# Altium PCB PCB.PcbDoc
Units mm, origin at the board's own origin, x right, y up, seen from the top; angles counter-clockwise.
Board outline 94 x 70 mm, 2 copper layers (Top Layer, Bottom Layer), stack 1.56 mm thick; 49 components, 33 nets, 150 pads, 54 vias.
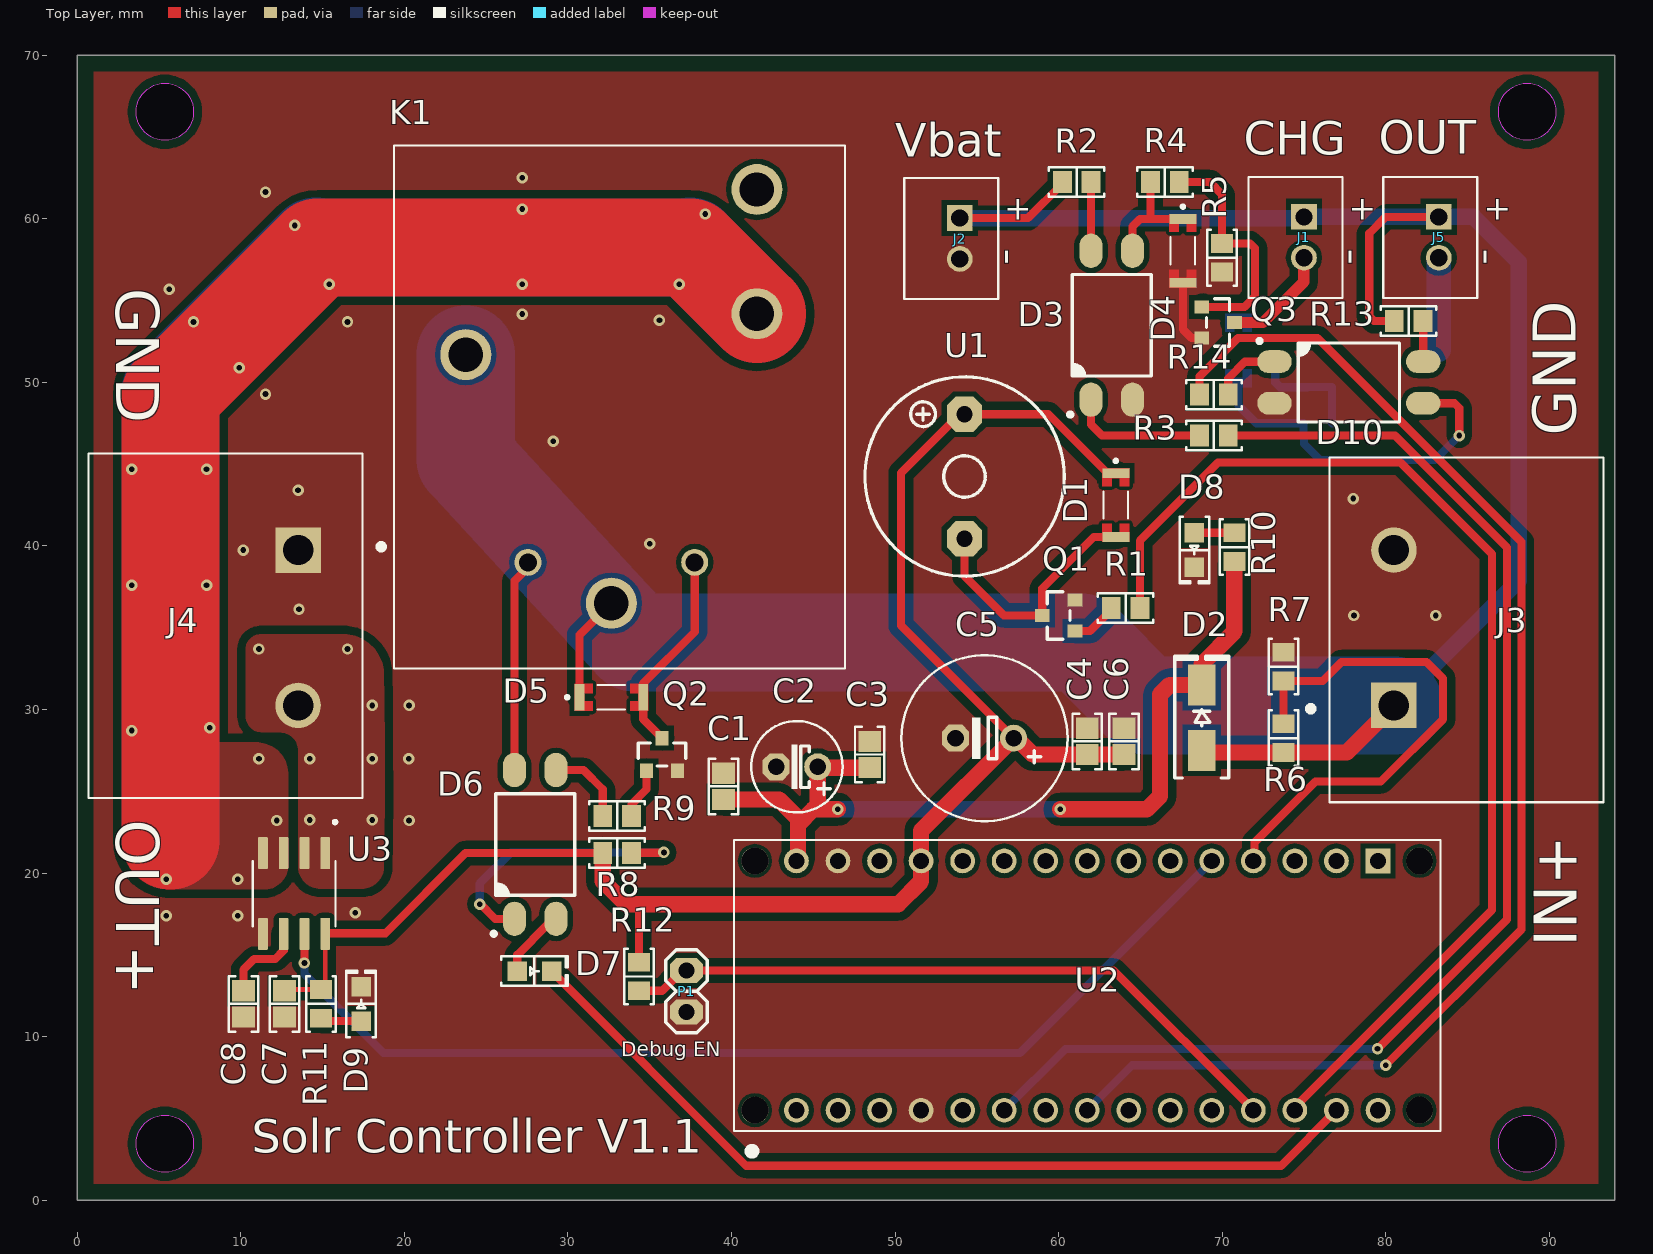
[diagram p0: Top Layer view]
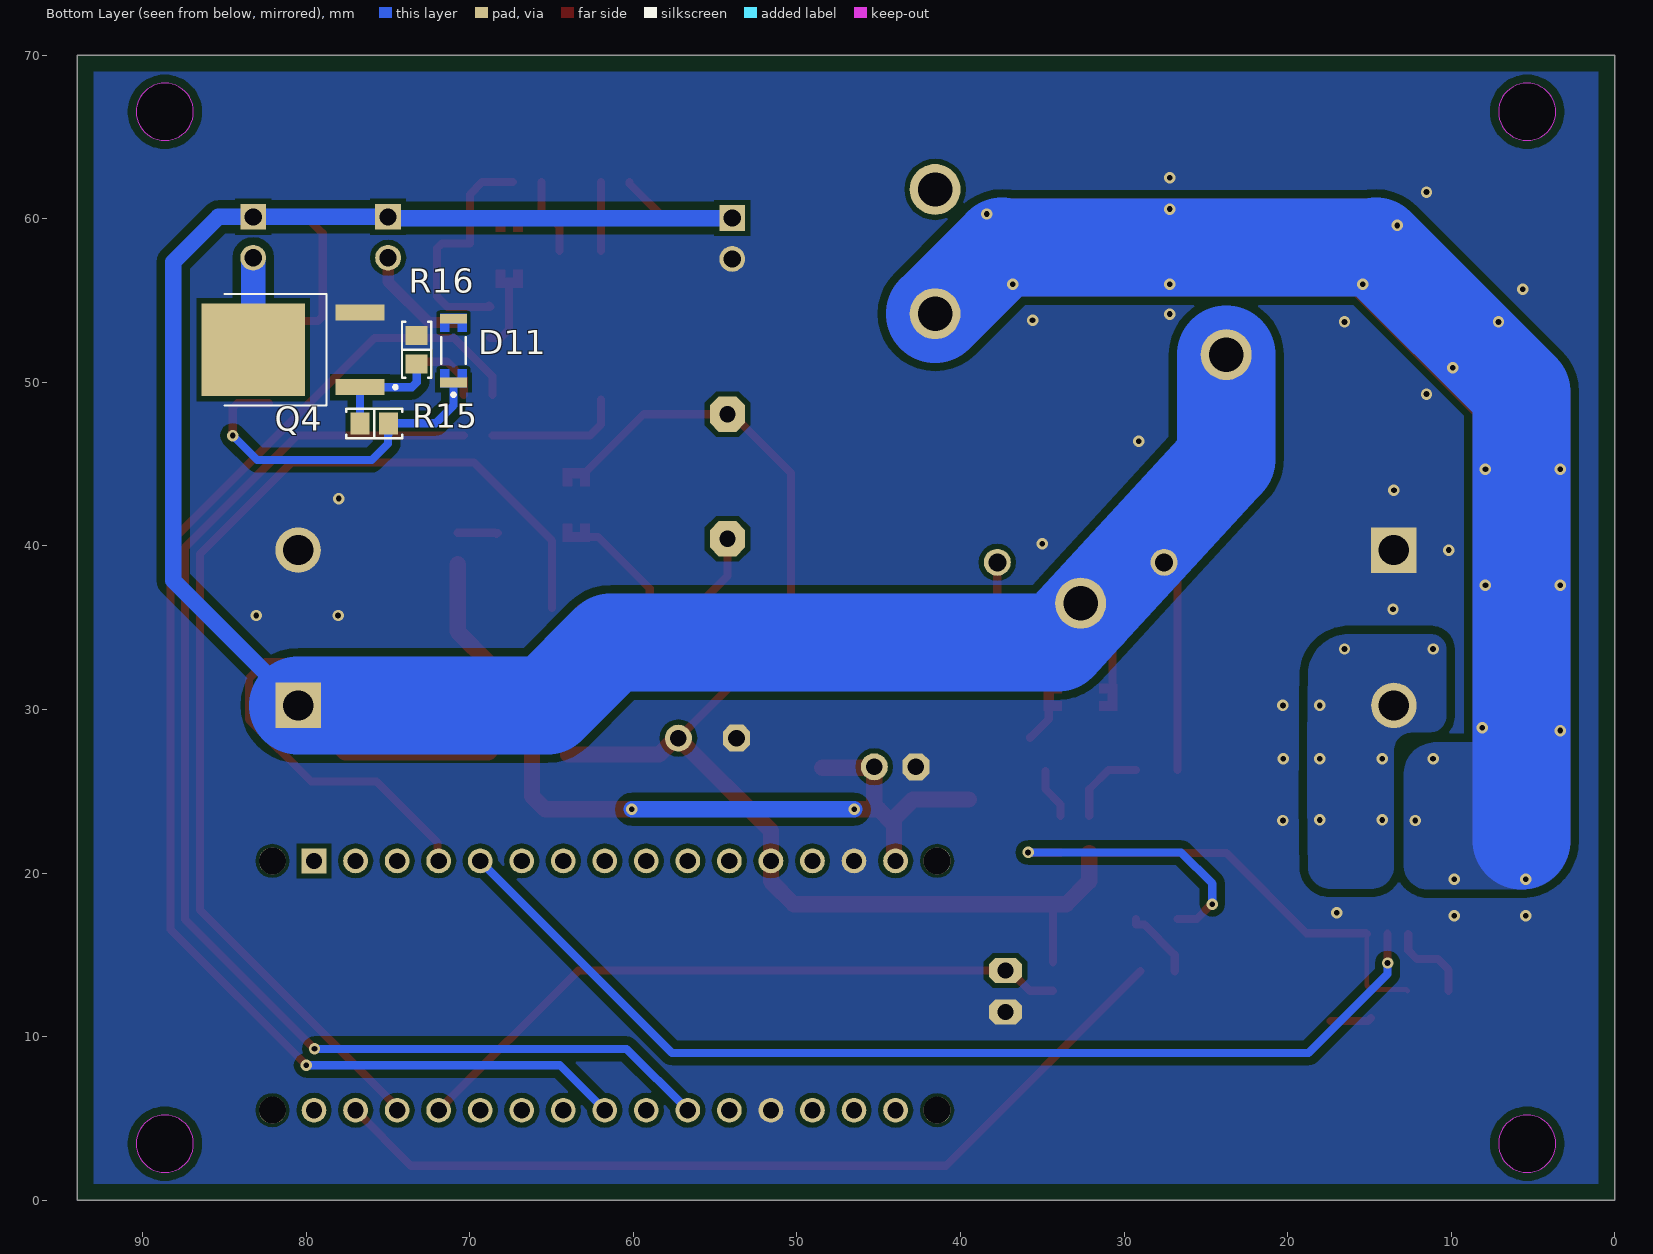
[diagram p1: Bottom Layer view, seen from below]
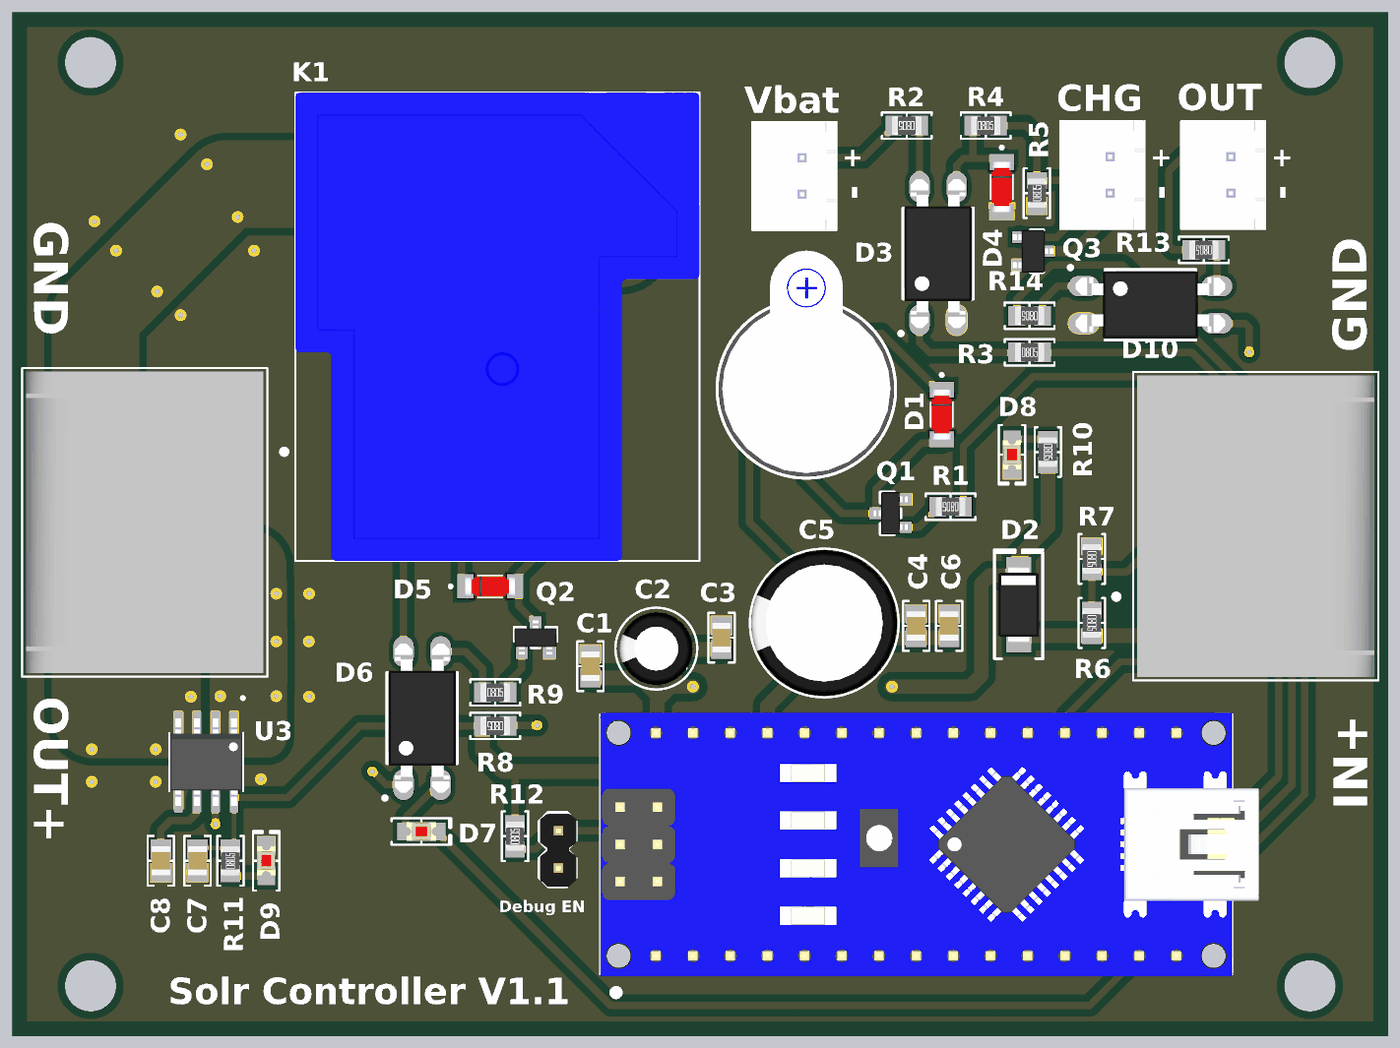
[diagram p2: 3D render of the assembled board from above, using the file's embedded part models]
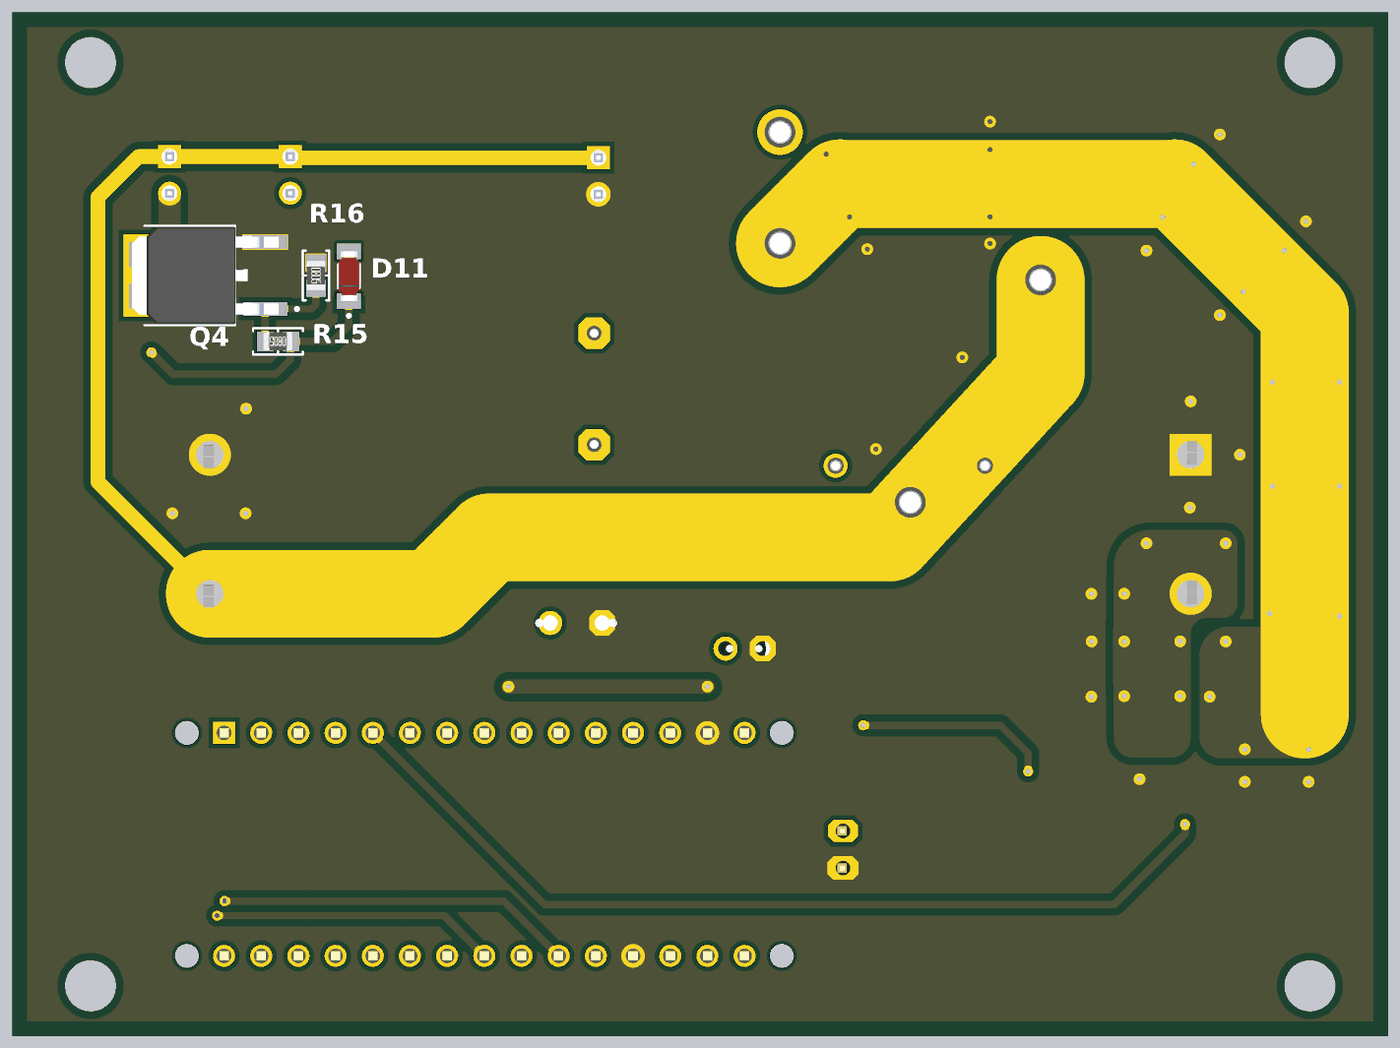
[diagram p3: 3D render of the assembled board from below, using the file's embedded part models]

## Layer stack, top to bottom
Top Solder: solder mask 0.02, Solder Resist, Dk 3.5
Top Layer: signal copper 0.03
Dielectric 1: dielectric 1.5, FR-4, Dk 4.8
Bottom Layer: signal copper 0.03
Bottom Solder: solder mask 0.02, Solder Resist, Dk 3.5

## Board outline
0,0 94,0 94,70 0,70
cut-out: 88.65,1.7 cw(c88.65,3.45) 86.9,3.45 cw(c88.65,3.45) 88.65,5.2 cw(c88.65,3.45) 90.4,3.45 cw(c88.65,3.45)
cut-out: 88.65,64.8 cw(c88.65,66.55) 86.9,66.55 cw(c88.65,66.55) 88.65,68.3 cw(c88.65,66.55) 90.4,66.55 cw(c88.65,66.55)
cut-out: 5.35,64.8 cw(c5.35,66.55) 3.6,66.55 cw(c5.35,66.55) 5.35,68.3 cw(c5.35,66.55) 7.1,66.55 cw(c5.35,66.55)
cut-out: 5.35,1.7 cw(c5.35,3.45) 3.6,3.45 cw(c5.35,3.45) 5.35,5.2 cw(c5.35,3.45) 7.1,3.45 cw(c5.35,3.45)

## Design rules (kind name [scope] priority, off if disabled: settings)
AcuteAngle [All] p1: minimum=6.00000000000000E+0001 checktracksonly=TRUE
AssemblyTestPointUsage [(not InNetClass('NOTESTPOINTS'))] p1: allowmultiple=TRUE
AssemblyTestPointUsage AssemblyTestPointUsageN [InNetClass('NOTESTPOINTS')] p2: valid=2 allowmultiple=TRUE
AssemblyTestpoint [All] p1: testpointundercomponent=TRUE minsize=0.8 maxsize=2 preferedsize=1 minholesize=0 maxholesize=0.35 preferedholesize=0 testpointgrid=1.27 usegrid=FALSE gridoriginx=87.5 gridoriginy=62.5 gridtolerance=0 allowsidetop=TRUE minspacing=2.54 // Zollner
BoardOutlineClearance BoardCopperOutlineClearance [(OnLayer('Top Layer') OR OnLayer('Bottom Layer') )] p1: gap=0.5 ignorepadtopadclearanceinfootprint=FALSE except(1: Poly-OutlineEdge Region-OutlineEdge; 1.5: SMDPad-OutlineEdge THPad-OutlineEdge)
Clearance PadToViaClearance [IsVia and not IsComponentVia vs IsPad] p1: gap=0.025 ignorepadtopadclearanceinfootprint=TRUE
Clearance "Clearance NOTSELV-SELV" [InNetClass('NOTSELV') vs NOT InNetClass('NOTSELV')] p2: gap=6 ignorepadtopadclearanceinfootprint=FALSE // according to previous calio PCB
Clearance "Clearance (FAB)" [All] p3: gap=0.203 ignorepadtopadclearanceinfootprint=TRUE except(0.305: Arc-Poly SMDPad-Poly THPad-Poly Via-Poly Fill-Poly; 0.5: Track-Poly Poly-Poly)
ComponentClearance ComponentClearance_NetTie [((ObjectKind = 'Component') And (ComponentType = 'Net Tie')) Or (Footprint = 'StarPoint') Or (Footprint like 'NetTieVia*')] p1: gap=-3.81 collisioncheckmode=3 verticalgap=-3.81 showdistances=FALSE
ComponentClearance [All] p2: gap=0.254 collisioncheckmode=3 verticalgap=0.254 showdistances=FALSE
DiffPairsRouting [All] p1: maxlimit=1.27 minlimit=0.203 mostfreqgap=0.203 toplayer_minwidth=0.152 toplayer_maxwidth=2.54 toplayer_prefwidth=0.254 bottomlayer_minwidth=0.152 bottomlayer_maxwidth=2.54 bottomlayer_prefwidth=0.254 maxuncoupledlength=12.7
FabricationTestPointUsage [All] p1: valid=2 allowmultiple=FALSE
FabricationTestpoint [All] p1: side=3 testpointundercomponent=TRUE minsize=1.016 maxsize=2.54 preferedsize=1.524 minholesize=0 maxholesize=1.016 preferedholesize=0.813 testpointgrid=0.025 allowsidetop=TRUE allowsidebottom=TRUE usegrid=FALSE gridtolerance=0
HoleSize [All] p1: absolutevalues=TRUE maxlimit=6.35 minlimit=0.3 maxpercent=80.000 minpercent=20.000 // Zollner
HoleToHoleClearance HoleToHoleClearance_NetTieVia [InPadClass('NetTieVias') vs InPadClass('NetTieVias')] p1: gap=0 allowstackedmicrovias=TRUE
HoleToHoleClearance [All] p2: gap=0.25 allowstackedmicrovias=TRUE // Zollner
MinimumAnnularRing [All] p1: minimumring=0.15 // PCBWAY
MinimumSolderMaskSliver [All] p1: minsoldermaskwidth=0.2 // Zollner
PlaneClearance PlaneClearance_1 [All] p1: clearance=1
PlaneConnect [All] p1: pad.planeconnectstyle=Relief pad.reliefexpansion=0.508 pad.reliefentries=4 pad.reliefconductorwidth=0.254 pad.reliefairgap=0.254 via.planeconnectstyle=Direct via.reliefexpansion=0.508 via.reliefentries=4 via.reliefconductorwidth=0.254 via.reliefairgap=0.254
PolygonConnect [All] p1: connectstyle=Direct reliefconductorwidth=0.254 reliefentries=4 polygonreliefangle="90 Angle" airgapwidth=0.254
RoutingVias [All] p1: holewidth=0.35 width=0.7 viastyle="Through Hole" minholewidth=0.3 minwidth=0.6 maxholewidth=1.27 maxwidth=1.27
SMDEntry [not IsTestpoint] p1: side=TRUE corner=TRUE anyangle=FALSE
SMDNeckDown [not IsTestpoint] p1: percent=90.000
SMDToCorner [All] p1: distance=10000
SMDToPlane [All] p1: distance=0
ShortCircuit [All vs not IsBoardCutoutRegion] p1: allowed=FALSE
SilkToSolderMaskClearance [IsPad] p1: minsilkscreentomaskgap=0.127 clearancetoexposedcopper=TRUE
SolderMaskExpansion [All] p1: expansion=0.05 istentingtop=FALSE // Zollner
SolderMaskExpansion SolderMaskExpansionToHoles [All] p2: expansion=0.1 istentingtop=FALSE soldermaskfromhole=TRUE // Zollner
SupplyNets "Schematic Supply Nets_5" [InNet('+5')] p1: voltage=0.000
SupplyNets "Schematic Supply Nets_4" [InNet('REL_OUT')] p2: voltage=0.000
SupplyNets "Schematic Supply Nets_3" [InNet('GND')] p3: voltage=0.000
SupplyNets "Schematic Supply Nets_2" [InNet('OUT_12V')] p4: voltage=0.000
SupplyNets "Schematic Supply Nets_1" [InNet('VIN')] p5: voltage=0.000
SupplyNets "Schematic Supply Nets" [InNet('+12')] p6: voltage=0.000
UnRoutedNet [All] p1: checkbadconnections=TRUE
Width [All] p1: maxlimit=12.7 minlimit=0.203 preferedwidth=0.254
16 further rules are at their usual default settings.

## Classes and differential pairs
component class main: C1 C2 C3 C4 C5 C6 C7 C8 D1 D2 D3 D4 D5 D6 D7 D8 D9 J1 J2 J3 J4 K1 P1 Q1 Q2 Q3 R1 R2 R3 R4 R5 R6 R7 R8 R9 R10 R11 R12 U1 U2 U3

## Components (designator, comment, footprint, x,y, rotation, side; value= is the part's Value field where it differs from the comment)
C1 "0.1µF" "CAP 0805_2012" 39.5,25.3 r270 top
C2 "100 µF" MY_E2.5-6mm 44,26.5 r180 top
C3 "10 µF" "CAP 0805_2012" 48.45,27.25 r270 top
C4 "0.1µF" "CAP 0805_2012" 61.75,28.05 r270 top
C5 "1000 µF" MY_E3.5-10mm 55.472,28.25 r180 top
C6 "10 µF" "CAP 0805_2012" 64,28.05 r270 top
C7 "0.1µF" "CAP 0805_2012" 12.655,12 r90 top
C8 "1000 pF" "CAP 0805_2012" 10.155,12 r90 top
D1 "LL4148" DIO_LL4148 63.5,42.5 r270 top
D2 "SS23-TP" "DO214AC SMA" 68.75,29.5 r90 top
D3 "LTV-817S-TA" "LITEON LTV-817" 63.25,53.5 r90 top
D4 "LL4148" DIO_LL4148 67.6,58.05 r270 top
D5 "LL4148" DIO_LL4148 32.65,30.75 r0 top
D6 "LTV-817S-TA" "LITEON LTV-817" 28,21.75 r90 top
D7 "Red" "LED 0805_2012 RED" 27.95,14 r0 top
D8 "Red" "LED 0805_2012 RED" 68.3,39.75 r270 top
D9 "Red" "LED 0805_2012 RED" 17.355,12 r90 top
D10 "LTV-817S-TA" "LITEON LTV-817" 77.75,50 r0 top
D11 "LL4148" DIO_LL4148 71,51.95 r90 bottom
J1 "B2B-PH-K-S(LF)(SN)" JST_B2B-XH-A(LF)(SN) 74.475,58.875 r90 top
J2 "B2B-PH-K-S(LF)(SN)" JST_B2B-XH-A(LF)(SN) 53.435,58.8 r90 top
J3 "HB9500 300V 30A" TE_5-1437648-7 80.5,35 r90 top locked
J4 "HB9500 300V 30A" TE_5-1437648-7 13.5,35 r270 top locked
J5 "B2B-XH-A(LF)(SN)" JST_B2B-XH-A(LF)(SN) 82.725,58.875 r90 top
K1 "SLA-12VDC-SL-C" RELAY_SLA-12VDC-SL-C 32.65,54.2 r0 top
P1 "Header 2" My_1X02 37.25,14.04 r90 top
Q1 "MMSS8050-L-TP" "MCCSEMI SOT-23-3" 60,35.75 r180 top
Q2 "MMSS8050-L-TP" "MCCSEMI SOT-23-3" 35.75,27.25 r90 top
Q3 "DMG3406L-7" "DIODES SOT-23-3" 69.75,53.664 r0 top
Q4 "DMG3406L-7" DPAK228P994X240-4N 80.81,52 r90 bottom
R1 "10 kOhms" "RES 0805_2012" 64.1,36.2 r180 top
R2 "4.7 kOhms" "RES 0805_2012" 61.105,62.25 r180 top
R3 "1 kOhms" "RES 0805_2012" 69.5,46.75 r0 top
R4 "100 Ohms" "RES 0805_2012" 66.5,62.25 r0 top
R5 "4.7 kOhms" "RES 0805_2012" 70,57.625 r90 top
R6 "30 kOhms" "RES 0805_2012" 73.75,28.25 r270 top
R7 "7.5 kOhms" "RES 0805_2012" 73.75,32.625 r270 top
R8 "1 kOhms" "RES 0805_2012" 33,21.225 r180 top
R9 "510 Ohms" "RES 0805_2012" 33,23.5 r0 top
R10 "1 kOhms" "RES 0805_2012" 70.75,39.932 r270 top
R11 "1 kOhms" "RES 0805_2012" 14.905,12 r90 top
R12 "10 kOhms" "RES 0805_2012" 34.35,13.675 r90 top
R13 "4.7 kOhms" "RES 0805_2012" 81.4,53.75 r180 top
R14 "1 kOhms" "RES 0805_2012" 69.5,49.25 r180 top
R15 "100 Ohms" "RES 0805_2012" 75.845,47.5 r0 bottom
R16 "4.7 kOhms" "RES 0805_2012" 73.25,52 r270 bottom
U1 "Buzzer 12mm" My_Buzzer 54.25,44.25 r90 top
U2 "Arduino Nano" MODULE_ARDUINO_NANO_A000005 61.75,13.12 r270 top locked
U3 "ACS712ELCTR30AT" SOIC127P600X175-8N 13.25,18.75 r270 top

## Footprints (in the part's own frame and the unit in brackets; to place one, negate y for a bottom-side part, rotate by r counter-clockwise, add the part's x,y. Pads: shape width x height; smd on the part's side, far side on the other; paste and mask are expansions set on the pad)
"CAP 0805_2012" [mm] "Chip Capacitor, 2-Leads, Body 2.00x1.20mm, IPC Medium Density"
  rect 1.3x1.4 smd: 1(-0.8,0) 2(0.8,0)
  silkscreen extent -1.7,-0.9 1.7,0.9, body extent -1,-0.64 1,0.64, height 1.26
DIO_LL4148 [mm]
  rect 0.6x1.65 smd: A(1.95,0) C(-1.95,0)
  Top Layer region: 2.25,-0.825 1.15,-0.825 1.15,-0.25 1.65,-0.25 1.65,0.25 1.15,0.25 1.15,0.825 2.25,0.825
  Top Layer region: -1.15,0.25 -1.65,0.25 -1.65,-0.25 -1.15,-0.25 -1.15,-0.825 -2.24,-0.825 -2.24,0.825 -1.15,0.825
  silkscreen extent -2.8,-0.75 0.83,0.75, body extent -1.7,-0.7 1.7,0.7, height 1.4
"DIODES SOT-23-3" [mm] "SOT23, 3-Leads, Body 2.90x2.40mm, Pitch 0.95mm, IPC Medium Density"
  rect 0.9x0.8 smd: 1(-1,0.95) 2(-1,-0.95) 3(1,0)
  silkscreen extent -0.7,-1.45 0.7,1.45, body extent -1.41,-1.45 1.41,1.45, height 1.5
"DO214AC SMA" [mm] "Molded Diode, 2-Leads, Body 4.30x2.60mm, IPC Medium Density"
  rect 2.5x1.7 smd: 1(-2,0) 2(2,0)
  silkscreen extent -3.68,-1.65 3.75,1.65, body extent -2.6,-1.37 2.6,1.37, height 2.4
DPAK228P994X240-4N [mm]
  rect 0.97x3.02 smd: 1(-2.286,-4.09) 3(2.286,-4.09)
  rect 5.67x6.32 smd paste-4: 4(0,2.44)
  silkscreen extent -3.4,-6.36 3.4,4.18, body extent -3.3,-5.02 3.3,5.02, height 2.4
JST_B2B-XH-A(LF)(SN) [mm]
  rect 1.575x1.575 / inner round 1.575 / far side rect 1.575x1.575 hole 1.05: 1(1.25,-0.525)
  round 1.575 hole 1.05: 2(-1.25,-0.525)
  silkscreen extent -3.7,-2.88 3.7,2.88, body extent -3.7,-2.88 3.7,2.88, height 7
"LED 0805_2012 RED" [mm] "Chip Diode, 2-Leads, Body 2.00x1.25mm, IPC Medium Density"
  rect 1.2x1.2 smd: 1(-1.05,0) 2(1.05,0)
  silkscreen extent -2.03,-0.9 2.03,0.9, body extent -1,-0.62 1,0.63, height 0.9
"LITEON LTV-817" [mm] "SOP, 4-Leads, Body 4.60x6.50mm, Pitch 2.54mm, IPC Medium Density"
  oval 2.1x1.4 smd: 1(-4.55,1.27) 2(-4.55,-1.27) 3(4.55,-1.27) 4(4.55,1.27)
  silkscreen extent -5.59,-2.41 3.1,2.66, body extent -5.1,-2.3 5.1,2.3, height 3.85
"MCCSEMI SOT-23-3" [mm] "SOT23, 3-Leads, Body 2.92x2.37mm, Pitch 0.95mm, IPC Medium Density"
  rect 0.9x0.8 smd: 1(-1,0.95) 2(-1,-0.95) 3(1,0)
  silkscreen extent -0.7,-1.45 0.7,1.45, body extent -1.16,-1.45 1.16,1.45, height 1.5
MODULE_ARDUINO_NANO_A000005 [mm]
  rect 1.508x1.508 / inner round 1.508 / far side rect 1.508x1.508 hole 1: 1(-7.62,17.78)
  round 1.508 hole 1: 2(-7.62,15.24) 3(-7.62,12.7) 4(-7.62,10.16) 5(-7.62,7.62) 6(-7.62,5.08) 7(-7.62,2.54) 8(-7.62,0) 9(-7.62,-2.54) 10(-7.62,-5.08) 11(-7.62,-7.62) 12(-7.62,-10.16) 13(-7.62,-12.7) 14(-7.62,-15.24) 15(-7.62,-17.78) 16(7.62,-17.78) 17(7.62,-15.24) 18(7.62,-12.7) 19(7.62,-10.16) 20(7.62,-7.62) 21(7.62,-5.08) 22(7.62,-2.54) 23(7.62,0) 24(7.62,2.54) 25(7.62,5.08) 26(7.62,7.62) 27(7.62,10.16) 28(7.62,12.7) 29(7.62,15.24) 30(7.62,17.78)
  round 1.651 hole 1.651 unplated: ""(-7.62,20.32) ""(-7.62,-20.32) ""(7.62,20.32) ""(7.62,-20.32)
  silkscreen extent -8.89,-21.59 10.23,21.59, body extent -9,-21.6 9,23.4, height 12.6
My_1X02 [mil]
  oct 60x80 hole 39.37: 1(-100,0) 2(0,0)
  silkscreen extent -150,-50 50,50, body extent -150,-51 46,47, height 323
My_Buzzer [mil]
  oct 85x85 hole 39.37: +(150,0) -(-150,0)
  silkscreen extent -240,-240 240,240, body extent -236,-236 372,236, height 381
MY_E2.5-6mm [mil]
  round 65 hole 40: +(-50,0)
  oct 65x65 hole 40: -(50,0)
  silkscreen extent -110,-110 110,110, body extent -98,-98 98,98, height 277
MY_E3.5-10mm [mil]
  round 65 hole 40: +(-70,0)
  oct 65x65 hole 40: -(70,0)
  silkscreen extent -200,-200 200,200, body extent -197,-197 196,197, height 434
RELAY_SLA-12VDC-SL-C [mm]
  round 1.65 hole 1.1: C1(-5.1,-15.2) C2(5.1,-15.2)
  round 3.116 hole 2.1: COM1(0,-17.7) COM2(-8.9,-2.5) NC(8.9,7.6) NO(8.9,0)
  silkscreen extent -13.3,-21.7 14.3,10.3, body extent -13.3,-21.7 14.3,10.3, height 20.4
"RES 0805_2012" [mm] "Chip Resistor, 2-Leads, Body 2.00x1.25mm, IPC Medium Density"
  rect 1.15x1.35 smd: 1(-0.875,0) 2(0.875,0)
  silkscreen extent -1.7,-0.9 1.7,0.9, body extent -1,-0.62 1,0.63, height 0.6
SOIC127P600X175-8N [mm]
  rrect25% 1.97x0.6 smd: 1(-2.475,1.905) 2(-2.475,0.635) 3(-2.475,-0.635) 4(-2.475,-1.905) 5(2.475,-1.905) 6(2.475,-0.635) 7(2.475,0.635) 8(2.475,1.905)
  silkscreen extent -4.47,-2.52 2,2.6, body extent -3,-2.45 3,2.45, height 1.75
TE_5-1437648-7 [mm]
  rect 2.775x2.775 hole 1.85: 1(-4.75,0)
  round 2.775 hole 1.85: 2(4.75,0)
  silkscreen extent -10.67,-12.83 10.41,5.18, body extent -10.44,-12.54 10.16,3.65, height 20.84

## Part data
C1 C4 C7: library part 08055G104ZAT2A, "CAP CER 0.1UF 50V Y5V 0805", Device Package="0805 (2012 Metric)", Manufacturer="AVX Corporation", Operating Temperature="-30°C ~ 85°C", Supplier Part Number 1=478-1421-1-ND, Temperature Coefficient="Y5V (F)", Tolerance="-20%, +80%", Voltage - Rated=50V, Applications="General Purpose", Capacitance=0.1µF, ComponentLink1Description=Datasheet, ComponentLink1URL=http://datasheets.avx.com/Y5V.pdf, ComponentLink2Description="DigiKey Link", ComponentLink2URL=http://digikey.com/product-detail/en/avx-corporation/08055G104ZAT2A/478-1421-1-ND/564453, id=137, LastUpdated=2020-09-02T01:04:40.390, Lifecycle Status=Active, Minimum Order=1, Mounting Type="Surface Mount, MLCC", Package / Case="0805 (2012 Metric)", Packaging=TapeAndReel, PartId=3166, Part Number=08055G104ZAT2A, Part Status=Active, Price=0.02, Series=-, Size / Dimension="0.079\" L x 0.049\" W (2.01mm x 1.25mm)", Supplier 1=DigiKey, Thickness (Max)="0.028\" (0.71mm)"
C2 C5: library part "Cap Pol", "Polar capacitor", ASiD Part Number=C-AS, Volte=25v
C3 C6: library part GRM21BC71E106ME11L, "CAP CER 10UF 25V X7S 0805", Device Package="0805 (2012 Metric)", Manufacturer="Murata Electronics", Operating Temperature="-55°C ~ 125°C", Supplier Part Number 1=490-10497-1-ND, Temperature Coefficient=X7S, Tolerance=±20%, Voltage - Rated=25V, Applications="General Purpose", Capacitance="10 µF", ComponentLink1Description=Datasheet, ComponentLink1URL=https://search.murata.co.jp/Ceramy/image/img/A01X/G101/ENG/GRM21BC71E106ME11-01.pdf, ComponentLink2Description="DigiKey Link", ComponentLink2URL=https://www.digikey.com/en/products/detail/murata-electronics/GRM21BC71E106ME11L/5027582, id=1512, LastUpdated=2023-01-03T20:10:38.020, Lifecycle Status=Active, Minimum Order=1, Mounting Type="Surface Mount, MLCC", Package / Case="0805 (2012 Metric)", Packaging=TapeAndReel, PartId=10164, Part Number=GRM21BC71E106ME11L, Part Status=Active, Price=0.11, Series=GRM, Size / Dimension="0.079\" L x 0.049\" W (2.00mm x 1.25mm)", Supplier 1=DigiKey, Thickness (Max)="0.057\" (1.45mm)"
C8: library part CS0805KRX7RBBB102, "CAP CER 1000PF 500V X7R 0805", Device Package="0805 (2012 Metric)", Manufacturer=Yageo, Operating Temperature="-55°C ~ 125°C", Supplier Part Number 1=311-3593-1-ND, Temperature Coefficient=X7R, Tolerance=±10%, Voltage - Rated=500V, Applications="Boardflex Sensitive", Capacitance="1000 pF", ComponentLink1Description=Datasheet, ComponentLink1URL=http://www.yageo.com/NewPortal/yageodocoutput?fileName=/pdf/MLCC/UPY-ST_NPOX7R_16V-to-3KV_5.pdf, ComponentLink2Description="DigiKey Link", ComponentLink2URL=https://www.digikey.com/en/products/detail/yageo/CS0805KRX7RBBB102/6097992, Features="Soft Termination", id=67, LastUpdated=2023-01-03T20:10:55.223, Lifecycle Status=Active, Minimum Order=1, Mounting Type="Surface Mount, MLCC", Package / Case="0805 (2012 Metric)", Packaging=TapeAndReel, PartId=2739, Part Number=CS0805KRX7RBBB102, Part Status=Active, Price=0.06, Series=CS, Size / Dimension="0.079\" L x 0.049\" W (2.00mm x 1.25mm)", Supplier 1=DigiKey, Thickness (Max)="0.039\" (1.00mm)"
D1 D4 D5 D11: "Diode Standard 100 V 300mA Surface Mount SOD-80 MiniMELF", Package="SOD-80-2 ON Semiconductor", Check_prices=https://www.snapeda.com/parts/LL4148/Onsemi/view-part/?ref=eda, MF=onsemi, MP=LL4148, SnapEDA_Link=https://www.snapeda.com/parts/LL4148/Onsemi/view-part/?ref=snap
D2: "DIODE SCHOTTKY 30V 2A DO214AC", Current - Average Rectified (Io)=2A, Current - Reverse Leakage @ Vr="500µA @ 30V", Manufacturer="Micro Commercial Co", Operating Temperature - Junction="-55°C ~ 125°C", Package / Case="DO-214AC, SMA", Supplier Device Package="DO-214AC (SMA)", Supplier Part Number 1=SS23-TPMSTR-ND, Voltage - DC Reverse (Vr) (Max)=30V, Voltage - Forward (Vf) (Max) @ If="550mV @ 2A", ComponentLink1Description=Datasheet, ComponentLink1URL=https://www.mccsemi.com/pdf/Products/SS22-SS210(HSMA).PDF, ComponentLink2Description="DigiKey Link", ComponentLink2URL=http://digikey.com/product-detail/en/micro-commercial-co/SS23-TP/SS23-TPMSTR-ND/2041482, Diode Type=Schottky, id=2166, LastUpdated=2023-01-02T20:53:32.833, Lifecycle Status=Active, Minimum Order=0, Mounting Type="Surface Mount", Packaging=TapeAndReel, PartId=2166, Part Number=SS23-TP, Part Status=Active, Price=0.08, Series=-, Speed="Fast Recovery =< 500ns, > 200mA (Io)", Supplier 1=DigiKey
D3 D6 D10: "OPTOISOLATR 5KV TRANSISTOR 4-SMD", Current - Dc Forward (If) (Max)=50mA, Current Transfer Ratio (Max)="600% @ 5mA", Current Transfer Ratio (Min)="50% @ 5mA", Device Package="4-SMD, Gull Wing", Manufacturer="Lite-On Inc.", Operating Temperature="-30°C ~ 110°C", Supplier Device Package=4-SMD, Supplier Part Number 1=160-2038-1-ND, Voltage - Forward (Vf) (Typ)=1.2V, Voltage - Isolation=5000Vrms, Voltage - Output (Max)=35V, ComponentLink1Description=Datasheet, ComponentLink1URL=http://optoelectronics.liteon.com/upload/download/DS-70-96-0016/LTV-8X7%20series%20201610%20.pdf, ComponentLink2Description="DigiKey Link", ComponentLink2URL=http://digikey.com/product-detail/en/lite-on-inc/LTV-817S-TA/160-2038-1-ND/3711420, Current - Output / Channel=50mA, id=3, Input Type=DC, LastUpdated=2020-01-12T21:59:02.467, Lifecycle Status=Active, Minimum Order=1, Mounting Type="Surface Mount", Number Of Channels=1, Output Type=Transistor, Package / Case="4-SMD, Gull Wing", Packaging=TapeAndReel, Part Number=LTV-817S-TA, Part Status=Active, Price=0.12, Rise / Fall Time (Typ)="4µs, 3µs", Series=-, Supplier 1=DigiKey, Vce Saturation (Max)=200mV
D7 D8 D9: library part 5973006607F, "LED RED CLEAR 0805 SMD", Current - Test=10mA, Device Package="0805 (2012 Metric)", Lens Color=Colorless, Manufacturer=Dialight, Millicandela Rating=6mcd, Supplier Device Package=0805, Supplier Part Number 1=350-5973006607FCT-ND, Voltage - Forward (Vf) (Typ)=2V, Color=Red, ComponentLink1Description=Datasheet, ComponentLink1URL=https://media.digikey.com/pdf/Data%20Sheets/Dialight%20PDFs/LED_SMD_Selector_Guide_Jun2020.pdf, ComponentLink2Description="DigiKey Link", ComponentLink2URL=https://www.digikey.com/en/products/detail/dialight/5973006607F/2432489, Configuration=Standard, id=1240, LastUpdated=2023-01-02T20:57:09.923, Lens Size="1.19mm x 1.24mm", Lens Style="Rectangle with Flat Top", Lens Transparency=Clear, Lifecycle Status=Active, Minimum Order=1, Mounting Type="Surface Mount", Package / Case="0805 (2012 Metric)", Packaging=TapeAndReel, PartId=1240, Part Number=5973006607F, Part Status=Active, Price=0.24, Series=597, Size / Dimension="2.00mm L x 1.25mm W", Supplier 1=DigiKey, Viewing Angle=130°, Wavelength - Dominant=630nm
J1 J2: library part B2B-XH-A(LF)(SN), "Connector Header Through Hole 2 position 0.098 (2.50mm)", Current Rating (Amps)=2A, Insulation Color=Natural, Manufacturer="JST Sales America Inc.", Material Flammability Rating="UL94 V-0", Operating Temperature="-25°C ~ 85°C", Supplier Part Number 1=455-1704-ND, Voltage Rating=100V, ComponentLink1Description=Datasheet, ComponentLink1URL=http://www.jst-mfg.com/product/pdf/eng/ePH.pdf, ComponentLink2Description="DigiKey Link", ComponentLink2URL=http://digikey.com/product-detail/en/jst-sales-america-inc/B2B-PH-K-S-LF-SN/455-1704-ND/926611, Connector Type=Header, Contact Finish - Mating=Tin, Contact Finish - Post=Tin, Contact Length - Mating="0.130\" (3.30mm)", Contact Length - Post="0.134\" (3.40mm)", Contact Material=Brass, Contact Shape=Square, Contact Type="Male Pin", Fastening Type="Detent Lock", id=11, Insulation Height="0.236\" (6.00mm)", Insulation Material="Polyamide (PA66), Nylon 6/6", LastUpdated=2020-01-03T23:40:58.447, Lifecycle Status=Active, Minimum Order=1, Mounting Type="Through Hole", Number Of Positions=2, Number Of Positions Loaded=All, Number Of Rows=1, Overall Contact Length="0.333\" (8.45mm)", Packaging=Bulk, PartId=11, Part Number=B2B-PH-K-S(LF)(SN), Part Status=Active, Pitch - Mating="0.079\" (2.00mm)", Price=0.17, Series=PH, Shrouding="Shrouded - 4 Wall", Style="Board to Cable/Wire", Supplier 1=DigiKey, Termination="Press-Fit, Solder"
J3 J4: library part 5-1437648-7, "Connector Barrier Strip 2 Position 8.26mm Screw Straight Cable Mount 25 Amp Contact", Package=None, Availability=Unavailable, MF="TE Connectivity", MP=5-1437648-7, Price=None, SnapEDA_Link=https://www.snapeda.com/parts/5-1437648-7/TE%20Connectivity%20AMP%20Connectors/view-part/2624425/?ref=snap
J5: "Connector Header Through Hole 2 position 0.098 (2.50mm)", Package=None, Check_prices=https://www.snapeda.com/parts/B2B-XH-A(LF)(SN)/JST+Sales+America+Inc./view-part/?ref=eda, MF="JST Sales America Inc.", MP=B2B-XH-A(LF)(SN), SnapEDA_Link=https://www.snapeda.com/parts/B2B-XH-A(LF)(SN)/JST+Sales+America+Inc./view-part/?ref=snap
K1: "SUBMINATURE HIGH POWER RELAY", Package=None, Availability="Not in stock", Check_prices=https://www.snapeda.com/parts/SLA-12VDC-SL-C/Songle+Relay/view-part/?ref=eda, MF="Songle Relay", MP=SLA-12VDC-SL-C, Price=None, SnapEDA_Link=https://www.snapeda.com/parts/SLA-12VDC-SL-C/Songle+Relay/view-part/?ref=snap
P1: "Header, 2-Pin", ASiD Part Number="Header 2-AS"
Q1 Q2: "TRANS NPN 25V 1.5A SOT23", Current - Collector (Ic) (Max)="1.5 A", Current - Collector Cutoff (Max)=100nA, DC Current Gain (Hfe) (Min) @ Ic, Vce="120 @ 100mA, 1V", Frequency - Transition=100MHz, Manufacturer="Micro Commercial Co", Operating Temperature="-55°C ~ 150°C (TJ)", Package / Case="TO-236-3, SC-59, SOT-23-3", Power - Max="625 mW", Supplier Device Package=SOT-23, Supplier Part Number 1=MMSS8050-L-TPMSCT-ND, Voltage - Collector Emitter Breakdown (Max)="25 V", ComponentLink1Description=Datasheet, ComponentLink1URL=https://www.mccsemi.com/pdf/Products/MMSS8050(SOT-23).pdf, ComponentLink2Description="DigiKey Link", ComponentLink2URL=https://www.digikey.com/en/products/detail/micro-commercial-co/MMSS8050-L-TP/2827197, id=278, LastUpdated=2023-01-02T21:11:10.217, Lifecycle Status=Active, Minimum Order=1, Mounting Type="Surface Mount", Packaging=TapeAndReel, PartId=278, Part Number=MMSS8050-L-TP, Part Status=Active, Price=0.02, Series=-, Supplier 1=DigiKey, Transistor Type=NPN, Vce Saturation (Max) @ Ib, Ic="500mV @ 80mA, 800mA"
Q3: "MOSFET N-CH 30V 3.6A SOT23", Current - Continuous Drain (Id) @ 25°C="3.6A (Ta)", Drain To Source Voltage (Vdss)="30 V", Drive Voltage (Max Rds On,  Min Rds On)="4.5V, 10V", Input Capacitance (Ciss) (Max) @ Vds="495 pF @ 15 V", Manufacturer="Diodes Incorporated", Operating Temperature="-55°C ~ 150°C (TJ)", Package / Case="TO-236-3, SC-59, SOT-23-3", Power Dissipation (Max)="770mW (Ta)", Supplier Device Package=SOT-23-3, Supplier Part Number 1=DMG3406L-7DICT-ND, ComponentLink1Description=Datasheet, ComponentLink1URL=https://www.diodes.com/assets/Datasheets/DMG3406L.pdf, ComponentLink2Description="DigiKey Link", ComponentLink2URL=https://www.digikey.com/en/products/detail/diodes-incorporated/DMG3406L-7/5223203, FET Type=N-Channel, Gate Charge (Qg) (Max) @ Vgs="11.2 nC @ 10 V", id=104, LastUpdated=2023-01-02T21:04:51.250, Lifecycle Status=Active, Minimum Order=1, Mounting Type="Surface Mount", Packaging=TapeAndReel, Part Number=DMG3406L-7, Part Status=Active, Price=0.05, Rds On (Max) @ Id, Vgs="50mOhm @ 3.6A, 10V", Series=-, Supplier 1=DigiKey, Technology="MOSFET (Metal Oxide)", Vgs (Max)=±20V, Vgs(Th) (Max) @ Id="2V @ 250µA"
Q4: library part AOD4184A, "N-Channel 40 V 13A (Ta), 50A (Tc) 2.3W (Ta), 50W (Tc) Surface Mount TO-252 (DPAK)", Current - Continuous Drain (Id) @ 25°C="3.6A (Ta)", Drain To Source Voltage (Vdss)="30 V", Drive Voltage (Max Rds On,  Min Rds On)="4.5V, 10V", Input Capacitance (Ciss) (Max) @ Vds="495 pF @ 15 V", Manufacturer="Diodes Incorporated", Operating Temperature="-55°C ~ 150°C (TJ)", Package / Case="TO-236-3, SC-59, SOT-23-3", Power Dissipation (Max)="770mW (Ta)", Supplier Device Package=SOT-23-3, Supplier Part Number 1=DMG3406L-7DICT-ND, ComponentLink1Description=Datasheet, ComponentLink1URL=https://www.diodes.com/assets/Datasheets/DMG3406L.pdf, ComponentLink2Description="DigiKey Link", ComponentLink2URL=https://www.digikey.com/en/products/detail/diodes-incorporated/DMG3406L-7/5223203, FET Type=N-Channel, Gate Charge (Qg) (Max) @ Vgs="11.2 nC @ 10 V", id=104, LastUpdated=2023-01-02T21:04:51.250, Lifecycle Status=Active, Minimum Order=1, Mounting Type="Surface Mount", Packaging=TapeAndReel, Part Number=DMG3406L-7, Part Status=Active, Price=0.05, Rds On (Max) @ Id, Vgs="50mOhm @ 3.6A, 10V", Series=-, Supplier 1=DigiKey, Technology="MOSFET (Metal Oxide)", Vgs (Max)=±20V, Vgs(Th) (Max) @ Id="2V @ 250µA"
R1 R12: library part RT0805DRD0710KL, "RES SMD 10K OHM 0.5% 1/8W 0805", Device Package="0805 (2012 Metric)", Manufacturer=Yageo, Operating Temperature="-55°C ~ 155°C", Power (Watts)="0.125W, 1/8W", Supplier Device Package=0805, Supplier Part Number 1=311-2699-1-ND, Temperature Coefficient=±25ppm/°C, Tolerance=±0.5%, ComponentLink1Description=Datasheet, ComponentLink1URL=https://www.yageo.com/upload/media/product/productsearch/datasheet/rchip/PYu-RT_1-to-0.01_RoHS_L_11.pdf, ComponentLink2Description="DigiKey Link", ComponentLink2URL=https://www.digikey.com/en/products/detail/yageo/RT0805DRD0710KL/1077814, Composition="Thin Film", Height - Seated (Max)="0.024\" (0.60mm)", id=58, LastUpdated=2023-01-02T20:44:51.957, Lifecycle Status=Active, Minimum Order=1, Number Of Terminations=2, Package / Case="0805 (2012 Metric)", Packaging=TapeAndReel, PartId=27797, Part Number=RT0805DRD0710KL, Part Status=Active, Price=0.03, Resistance="10 kOhms", Series=RT, Size / Dimension="0.079\" L x 0.049\" W (2.00mm x 1.25mm)", Supplier 1=DigiKey
R2 R5 R13 R16: library part RC0805FR-074K7P, "RES SMD 4.7K OHM 1% 1/8W 0805", Device Package="0805 (2012 Metric)", Manufacturer=Yageo, Operating Temperature="-55°C ~ 155°C", Power (Watts)="0.125W, 1/8W", Supplier Device Package=0805, Supplier Part Number 1=YAG1325CT-ND, Temperature Coefficient=±100ppm/°C, Tolerance=±1%, ComponentLink1Description=Datasheet, ComponentLink1URL=http://www.yageo.com/NewPortal/yageodocoutput?fileName=/pdf/R-Chip/PYu-RC_51_RoHS_P_0.pdf, ComponentLink2Description="DigiKey Link", ComponentLink2URL=https://www.digikey.com/en/products/detail/yageo/RC0805FR-074K7P/4935340, Composition="Thick Film", Features="Moisture Resistant", Height - Seated (Max)="0.024\" (0.60mm)", id=105, LastUpdated=2023-01-02T20:44:51.553, Lifecycle Status=Active, Minimum Order=1, Number Of Terminations=2, Package / Case="0805 (2012 Metric)", Packaging=TapeAndReel, PartId=27895, Part Number=RC0805FR-074K7P, Part Status=Active, Price=0.01, Resistance="4.7 kOhms", Series="RC-P Lead Free", Size / Dimension="0.079\" L x 0.049\" W (2.00mm x 1.25mm)", Supplier 1=DigiKey
R3 R8 R10 R11 R14: library part CRCW08051K00FKEA, "RES SMD 1K OHM 1% 1/8W 0805", Device Package="0805 (2012 Metric)", Manufacturer="Vishay Dale", Operating Temperature="-55°C ~ 155°C", Power (Watts)="0.125W, 1/8W", Ratings=AEC-Q200, Supplier Device Package=0805, Supplier Part Number 1=541-1.00KCCT-ND, Temperature Coefficient=±100ppm/°C, Tolerance=±1%, ComponentLink1Description=Datasheet, ComponentLink1URL=http://www.vishay.com/docs/20035/dcrcwe3.pdf, ComponentLink2Description="DigiKey Link", ComponentLink2URL=http://digikey.com/product-detail/en/vishay-dale/CRCW08051K00FKEA/541-1.00KCCT-ND/1180783, Composition="Thick Film", Features="Automotive AEC-Q200", Height - Seated (Max)="0.020\" (0.50mm)", id=200, LastUpdated=2023-01-02T20:44:50.643, Lifecycle Status=Active, Minimum Order=1, Number Of Terminations=2, Package / Case="0805 (2012 Metric)", Packaging=TapeAndReel, PartId=28103, Part Number=CRCW08051K00FKEA, Part Status=Active, Price=0.01, Resistance="1 kOhms", Series=CRCW, Size / Dimension="0.079\" L x 0.049\" W (2.00mm x 1.25mm)", Supplier 1=DigiKey
R4 R15: library part RC0805FR-07100RP, "RES SMD 100 OHM 1% 1/8W 0805", Device Package="0805 (2012 Metric)", Manufacturer=Yageo, Operating Temperature="-55°C ~ 155°C", Power (Watts)="0.125W, 1/8W", Supplier Device Package=0805, Supplier Part Number 1=YAG1318CT-ND, Temperature Coefficient=±150ppm/°C, Tolerance=±1%, ComponentLink1Description=Datasheet, ComponentLink1URL=http://www.yageo.com/NewPortal/yageodocoutput?fileName=/pdf/R-Chip/PYu-RC_51_RoHS_P_0.pdf, ComponentLink2Description="DigiKey Link", ComponentLink2URL=https://www.digikey.com/en/products/detail/yageo/RC0805FR-07100RP/4935333, Composition="Thick Film", Features="Moisture Resistant", Height - Seated (Max)="0.024\" (0.60mm)", id=489, LastUpdated=2023-01-02T20:44:48.083, Lifecycle Status=Active, Minimum Order=1, Number Of Terminations=2, Package / Case="0805 (2012 Metric)", Packaging=TapeAndReel, PartId=28669, Part Number=RC0805FR-07100RP, Part Status=Active, Price=0.01, Resistance="100 Ohms", Series="RC-P Lead Free", Size / Dimension="0.079\" L x 0.049\" W (2.00mm x 1.25mm)", Supplier 1=DigiKey
R6: library part RT0805BRD0730KL, "RES SMD 30K OHM 0.1% 1/8W 0805", Device Package="0805 (2012 Metric)", Manufacturer=Yageo, Operating Temperature="-55°C ~ 155°C", Power (Watts)="0.125W, 1/8W", Supplier Device Package=0805, Supplier Part Number 1=YAG1865CT-ND, Temperature Coefficient=±25ppm/°C, Tolerance=±0.1%, ComponentLink1Description=Datasheet, ComponentLink1URL=https://www.yageo.com/upload/media/product/productsearch/datasheet/rchip/PYu-RT_1-to-0.01_RoHS_L_11.pdf, ComponentLink2Description="DigiKey Link", ComponentLink2URL=https://www.digikey.com/en/products/detail/yageo/RT0805BRD0730KL/1075808, Composition="Thin Film", Height - Seated (Max)="0.024\" (0.60mm)", id=4497, LastUpdated=2023-01-02T20:44:13.950, Lifecycle Status=Active, Minimum Order=1, Number Of Terminations=2, Package / Case="0805 (2012 Metric)", Packaging=TapeAndReel, PartId=36699, Part Number=RT0805BRD0730KL, Part Status=Active, Price=0.04, Resistance="30 kOhms", Series=RT, Size / Dimension="0.079\" L x 0.049\" W (2.00mm x 1.25mm)", Supplier 1=DigiKey
R7: library part RT0805BRD077K5L, "RES SMD 7.5K OHM 0.1% 1/8W 0805", Device Package="0805 (2012 Metric)", Manufacturer=Yageo, Operating Temperature="-55°C ~ 155°C", Power (Watts)="0.125W, 1/8W", Supplier Device Package=0805, Supplier Part Number 1=YAG1974CT-ND, Temperature Coefficient=±25ppm/°C, Tolerance=±0.1%, ComponentLink1Description=Datasheet, ComponentLink1URL=https://www.yageo.com/upload/media/product/productsearch/datasheet/rchip/PYu-RT_1-to-0.01_RoHS_L_11.pdf, ComponentLink2Description="DigiKey Link", ComponentLink2URL=https://www.digikey.com/en/products/detail/yageo/RT0805BRD077K5L/1076048, Composition="Thin Film", Height - Seated (Max)="0.024\" (0.60mm)", id=2995, LastUpdated=2023-01-02T20:44:27.430, Lifecycle Status=Active, Minimum Order=1, Number Of Terminations=2, Package / Case="0805 (2012 Metric)", Packaging=TapeAndReel, PartId=33662, Part Number=RT0805BRD077K5L, Part Status=Active, Price=0.04, Resistance="7.5 kOhms", Series=RT, Size / Dimension="0.079\" L x 0.049\" W (2.00mm x 1.25mm)", Supplier 1=DigiKey
R9: library part RT0805BRD07510RL, "RES SMD 510 OHM 0.1% 1/8W 0805", Device Package="0805 (2012 Metric)", Manufacturer=Yageo, Operating Temperature="-55°C ~ 155°C", Power (Watts)="0.125W, 1/8W", Supplier Device Package=0805, Supplier Part Number 1=YAG4914CT-ND, Temperature Coefficient=±25ppm/°C, Tolerance=±0.1%, ComponentLink1Description=Datasheet, ComponentLink1URL=https://www.yageo.com/upload/media/product/productsearch/datasheet/rchip/PYu-RT_1-to-0.01_RoHS_L_11.pdf, ComponentLink2Description="DigiKey Link", ComponentLink2URL=https://www.digikey.com/en/products/detail/yageo/RT0805BRD07510RL/1075941, Composition="Thin Film", Height - Seated (Max)="0.024\" (0.60mm)", id=2966, LastUpdated=2023-01-02T20:44:27.697, Lifecycle Status=Active, Minimum Order=1, Number Of Terminations=2, Package / Case="0805 (2012 Metric)", Packaging=TapeAndReel, PartId=33608, Part Number=RT0805BRD07510RL, Part Status=Active, Price=0.04, Resistance="510 Ohms", Series=RT, Size / Dimension="0.079\" L x 0.049\" W (2.00mm x 1.25mm)", Supplier 1=DigiKey
U1: library part Buzzer, "5-12v small buzzer (12mm)", ASiD Part Number="Buzzer small-AS"
U2: library part ARDUINO_NANO_A000005, "ATSAMD21G18A Arduino Nano 33 IoT series ARMÂ® CortexÂ®-M0+ MCU 32-Bit Embedded Evaluation Board", Package="Non-Standard Arduino", Check_prices=https://www.snapeda.com/parts/ARDUINO%20NANO%20A000005/Arduino/view-part/?ref=eda, MF=Arduino, MP="ARDUINO NANO A000005", SnapEDA_Link=https://www.snapeda.com/parts/ARDUINO%20NANO%20A000005/Arduino/view-part/?ref=snap
U3: "Current Sensor 30A 1 Channel Hall Effect, Open Loop Bidirectional 8-SOIC (0.154, 3.90mm Width)", Package="SOIC-8 Allegro MicroSystems LLC", Availability="In Stock", Check_prices=https://www.snapeda.com/parts/ACS712ELCTR-30A-T/Allegro+Industries/view-part/?ref=eda, MF=Allegro, MP=ACS712ELCTR-30A-T, Price=None, Purchase-URL=https://pricing.snapeda.com/search/part/ACS712ELCTR-30A-T/?ref=eda, SnapEDA_Link=https://www.snapeda.com/parts/ACS712ELCTR-30A-T/Allegro+Industries/view-part/?ref=snap

## Via types
v1: diameter 0.7, hole 0.35, Top Layer to Bottom Layer, 54 vias

## Nets (pads, with @x,y where several pads share a name; then routed paths per layer and width w, separated by ;. In a path a pad name is that pad's centre, name@x,y a point inside that pad or via, vN(x,y) a via of type N, cw(c..) or ccw(c..) an arc to the next point about the centre after c; other vN are vias at no path point)
+5: C4.2 C5.+ C6.2 C7.2 D1.C R8.2 R11.2 R12.2 U1.+ U2.12 U3.8 | length 104.2
  Top Layer w0.3: C7.2 12.73,12.875 R11.2 15.155,13.125 U3.8
  Top Layer w0.5: U3.8 15.2,16.32 18.837,16.32 23.741,21.225 R8.2 ; R12.2 34.35,18.1 ; C5.+ 50.36,35.14 50.36,44.46 53.96,48.06 U1.+ 59.365,48.06 62.975,44.45 D1.C
  Top Layer w1: R8.2 32.125,19.509 33.534,18.1 34.35,18.1 50.2,18.1 51.59,19.49 51.59,22.59 C5.+ 57.426,28.25 58.426,27.25 C4.2 C6.2
+12: D2.1 D5.C D6.4 J1.1 J2.1 J3.1 J5.1 K1.C1 K1.COM1 K1.COM2 R2.2 R6.2 R13.2 | length 185.9
  Top Layer w0.5: D6.4 26.73,37.869 27.55,38.689 K1.C1 ; D5.C 30.7,34.55 K1.COM1 ; J2.1@54.25,60.05 58.13,60.05 60.23,62.15 R2.2 ; R13.2 79.293,53.75 79,54.043 79,59.125 80,60.125 J5.1
  Top Layer w1: D2.1 68.875,27.375 R6.2 77.625,27.375 J3.1
  Bottom Layer w1: J2.1@54.25,60.05 74.925,60.05 J1.1 J5.1 85.375,60.125 88.14,57.36 88.14,37.89 J3.1
  Bottom Layer w6: K1.COM2 23.75,45.3 28.63,39.993 32.213,36.098 34.05,34.1 61.4,34.1 65.25,30.25 J3.1
ACS_SENSOR: U2.5 U3.7 | length 64.8
  Top Layer w0.5: v1(13.885,14.5) U3.7 U3.7@13.898,16.288
  Bottom Layer w0.5: v1(13.885,14.5) 13.885,13.831 18.716,9 57.63,9 U2.5
BATTERY_OUT: R14.2 U2.23 | length 81.8
  Top Layer w0.5: R14.2 68.625,50.375 70.964,52.714 75.836,52.714 88.309,40.241 88.309,16.559 v1(80,8.25)
  Bottom Layer w0.5: U2.23 64.5,8.25 v1(80,8.25)
BUZZER: R1.1 U2.28 | length 68.9
  Top Layer w0.5: R1.1 64.975,40.325 69.75,45.1 80.9,45.1 86.5,39.5 86.5,17.75 74.45,5.7 U2.28
CHARGER: R3.2 U2.21 | length 78.2
  Top Layer w0.5: R3.2 80.575,46.75 87.413,39.912 87.413,17.163 v1(79.5,9.25)
  Bottom Layer w0.5: U2.21 60.42,9.25 v1(79.5,9.25)
DEBUG_EN: P1.2 R12.1 U2.27 | length 41.6
  Top Layer w0.5: R12.1 35.75,12.8 36.99,14.04 P1.2 63.37,14.04 U2.27
GND: C1.1 C2.- C3.1 C4.1 C5.- C6.1 C7.1 C8.1 D3.2 D4.A D8.2 D9.2 D10.2 D11.A J2.2 J3.2 J4.1 P1.1 Q1.2 Q2.2 Q3.2 Q4.3 R5.1 R7.1 R16.1 U2.14 U2.19 U3.5 | length 4.2
  Top Layer w0.5: D4.A 67.6,53.25 68.136,52.714 Q3.2
  other v1: 5.436,17.396 9.8,17.396 16.987,17.578 20.282,23.214 20.262,26.991 20.282,30.25 78.058,35.75 83.057,35.75 13.552,36.135 10.14,39.75 35,40.14 78.022,42.9 13.495,43.4 29.1,46.4 11.502,49.291 16.517,53.7 35.591,53.8 27.2,54.183 5.622,55.7 11.502,61.639 27.2,62.516
LOAD_OUT: D7.2 U2.29 | length 54.3
  Top Layer w0.5: D7.2 40.9,2.1 73.59,2.1 U2.29
NetC8_2: C8.2 U3.6 | length 5.2
  Top Layer w0.5: C8.2 10.155,14.091 10.814,14.75 12.1,14.75 12.615,15.265 U3.6
NetD1_A: D1.A Q1.3 U1.- | length 15.5
  Top Layer w0.5: U1.- 54.25,38.17 56.67,35.75 Q1.3 59,37.4 62.15,40.55 D1.A
NetD3_1: D3.1 R3.1 | length 8.5
  Top Layer w0.5: D3.1 61.98,47.42 62.65,46.75 R3.1
NetD3_3: D3.3 D4.C R4.1 | length 7.1
  Top Layer w0.5: D3.3 64.52,59.545 64.975,60 65.75,60 ; R4.1 65.625,60.125 65.75,60 ; D4.C 65.75,60
NetD3_4: D3.4 R2.1 | length 4.2
  Top Layer w0.5: D3.4 R2.1
NetD5_A: D5.A K1.C2 Q2.3 | length 12.6
  Top Layer w0.5: Q2.3 Q2.3@35.75,28.264 ; Q2.3@35.75,28.3 Q2.3@35.75,28.264 ; K1.C2 37.75,34.75 34.6,31.6 D5.A 34.6,29.414 Q2.3@35.75,28.264
NetD6_1: D6.1 R8.1 | length 17.8
  Top Layer w0.5: v1(24.6,18.1) 24.654,18.1 25.554,17.2 D6.1 ; R8.1 33.893,21.243 35.847,21.243 v1(35.865,21.26)
  Bottom Layer w0.5: v1(24.6,18.1) 24.6,19.35 26.51,21.26 v1(35.865,21.26)
NetD6_2: D6.2 D7.1 | length 4.5
  Top Layer w0.5: D7.1 26.9,15 28.75,16.85 29.27,16.85 D6.2
NetD6_3: D6.3 R9.1 | length 5
  Top Layer w0.5: D6.3 30.95,26.3 32.125,25.125 R9.1
NetD8_1: D8.1 R10.1 | length 2.5
  Top Layer w0.5: D8.1 68.375,40.725 68.457,40.807 R10.1
NetD9_1: D9.1 R11.1 | length 2.5
  Top Layer w0.5: R11.1 15.08,10.95 D9.1
NetD10_1: D10.1 R14.1 | length 4.2
  Top Layer w0.5: R14.1 70.375,50.25 71.395,51.27 D10.1
NetD10_3: D10.3 D11.C R15.1 | length 21.6
  Top Layer w0.5: D10.3 84.207,48.73 84.5,48.437 v1(84.5,46.75)
  Bottom Layer w0.5: D11.C 71,48.598 72.098,47.5 R15.1 74.97,46.8 75,46.77 75,46.25 76,45.25 83,45.25 v1(84.5,46.75)
NetD10_4: D10.4 R13.1 | length 2.5
  Top Layer w0.5: D10.4 R13.1@82.3,53.725
NetJ1_2: J1.2 Q3.3 | length 6.7
  Top Layer w0.7: Q3.3 72.5,53.664 75,56.164 J1.2
NetJ5_2: J5.2 Q4.4 | length 5.6
  Bottom Layer w1.5: Q4.4 J5.2
NetQ1_1: Q1.1 R1.2 | length 2.9
  Top Layer w0.5: Q1.1 61.925,34.8 63.225,36.1 R1.2
NetQ2_1: Q2.1 R9.2 | length 3.1
  Top Layer w0.5: R9.2 33.875,24.2 34.8,25.125 Q2.1
NetQ3_1: Q3.1 R4.2 R5.2 | length 14.6
  Top Layer w0.5: R4.2 69.25,62.25 70,61.5 R5.2 71.707,58.5 72,58.207 72,55.25 71.364,54.614 Q3.1 Q3.1@68.836,54.7
NetQ4_1: Q4.1 R15.2 R16.2 | length 6.9
  Bottom Layer w0.5: R16.2 73.25,50.003 73.543,49.71 75.181,49.71 75.185,49.714 Q4.1 R15.2
OUT_12V: J4.2 U3.1 U3.2
  other v1: 14.216,23.25 18.04,23.25 14.216,26.991 18.04,26.991 18.04,30.25 11.104,33.7 16.517,33.7
REL_OUT: K1.NO U3.3 U3.4 | length 137.2
  Top Layer w6: 5.691,22 5.691,49.261 14.68,58.25 37.5,58.25 K1.NO
  Bottom Layer w6: 5.691,49.4 14.591,58.3 ; 5.7,22 5.7,49.4 ; 14.6,58.25 37.45,58.25 ; 37.45,58.3 K1.NO
  other v1: 5.436,19.621 9.8,19.621 12.2,23.214 11.104,26.991 3.326,28.714 8.1,28.893 3.326,37.6 7.9,37.6 3.326,44.7 7.9,44.7 9.9,50.9 7.1,53.7 15.4,56 27.2,56 36.8,56 13.3,59.6 38.4,60.3 27.2,60.6
VIN: C1.2 C2.+ C3.2 D2.2 R10.2 U2.15 | length 53.6
  Top Layer w0.254: C2.+ C2.+@45.32,26.45
  Top Layer w1: C1.2 42.9,24.5 44.248,23.152 ; U2.15 44.067,20.837 44.067,22.972 44.996,23.9 ; C2.+ 45.27,24.175 44.996,23.9 ; C2.+@45.32,26.45 C3.2 ; v1(46.5,23.9) 44.996,23.9 ; v1(60.1,23.9) 65.4,23.9 66.2,24.7 66.2,30.914 66.786,31.5 D2.2 68.75,32.775 70.75,34.775 R10.2@70.75,38.875
  Bottom Layer w1: v1(46.5,23.9) v1(60.1,23.9)
VOLTAGE_SENSOR: R6.1 R7.2 U2.4 | length 31.6
  Top Layer w0.5: U2.4 71.975,20.805 71.975,21.875 75.7,25.6 79.7,25.6 83.5,29.4 83.5,31.9 82.5,32.9 77.3,32.9 76.15,31.75 R7.2 R6.1
pads on no net: K1.NC U2. U2.1 U2.2 U2.3 U2.6 U2.7 U2.8 U2.9 U2.10 U2.11 U2.13 U2.16 U2.17 U2.18 U2.20 U2.22 U2.24 U2.25 U2.26 U2.30

## Polygon pours and split planes (outlines as drawn)
GND on Top Layer "GND_L01_P018" (solid, remove dead copper, pour order 18): 0,0 94,0 94,70 0,70
OUT_12V on Top Layer "OUT_12V_L01_P012" (solid, remove dead copper, pour order 12): 12.394,28.6 11.3,28.6 cw(c11.3,29.6) 10.3,29.6 10.3,33.7 cw(c11.2,33.7) 11.2,34.6 16.277,34.6 cw(c16.277,32.141) 18.735,32.184 cw(c-341.643,25.907) 18.747,20.362 cw(c17.414,20.383) 17.414,19.049 14.86,19.049 cw(c14.86,20.409) 13.5,20.409 13.5,27.494 ccw(c12.394,27.494)
REL_OUT on Top Layer "REL_OUT_L01_P010" (solid, remove dead copper, pour order 10): 12.9,25.9 12.9,20.6 cw(c11.404,20.497) 11.5,19 5.628,19 cw(c5.628,21.878) 2.75,21.878 2.75,24.55 cw(c6.203,24.55) 6.202,28.002 10.9,28.003 cw(c10.9,26)
GND on Bottom Layer "GND_L02_P019" (solid, remove dead copper, pour order 19): 0,0 94,0 94,70 0,70
OUT_12V on Bottom Layer "OUT_12V_L02_P016" (solid, remove dead copper, pour order 16): 12.394,28.6 11.3,28.6 cw(c11.3,29.6) 10.3,29.6 10.3,33.7 cw(c11.2,33.7) 11.2,34.6 16.277,34.6 cw(c16.277,32.141) 18.735,32.184 cw(c-341.652,25.907) 18.747,20.362 cw(c17.414,20.383) 17.414,19.049 14.86,19.049 cw(c14.86,20.409) 13.5,20.409 13.5,27.494 ccw(c12.394,27.494)
REL_OUT on Bottom Layer "REL_OUT_L02_P014" (solid, remove dead copper, pour order 14): 12.9,25.9 12.9,20.6 cw(c11.404,20.497) 11.5,19 5.628,19 cw(c5.628,21.878) 2.75,21.878 2.75,24.55 cw(c6.203,24.55) 6.203,28.003 10.9,28.003 cw(c10.9,26)

## Silkscreen, mask and mechanical layers (free items; w line width, h text height)
Top Overlay:
  text "OUT" at 79.572,63.307 h3.52
  text "CHG" at 71.326,63.25 h3.52
  text "Vbat" at 50,63.124 h3.52
  text "+" at 56.67,59.47 h2.52
  text "+" at 77.75,59.47 h2.52
  text "+" at 86,59.47 h2.52
  text "-" at 58.25,57.17 h3.52 r90
  text "-" at 79.25,57.17 h3.52 r90
  text "-" at 87.5,57.17 h3.52 r90
  text "GND" at 1.5,55.75 h4.52 r270
  text "GND" at 92.5,46.75 h4.52 r90
  text "OUT+" at 1.5,23.25 h4.52 r270
  text "IN+" at 92.557,15.5 h4.52 r90
  text "Debug EN" at 33.25,8.5 h1.52
  text "Solr Controller V1.1" at 10.655,2.213 h3.52
Board outline:
  circle w0.013: c88.65,3.45 r1.75
  circle w0.013: c5.35,66.55 r1.75
  circle w0.013: c5.35,3.45 r1.75
  circle w0.013: c88.65,66.55 r1.75
  lines w0.013: 0,0 94,0 94,70 0,70 0,0

## Dimensions
94,70 to 94,0 on PCBM Notes
0,0 to 94,0 on PCBM Notes